# EAGLE board ledikuutio (EAGLE 6.1)
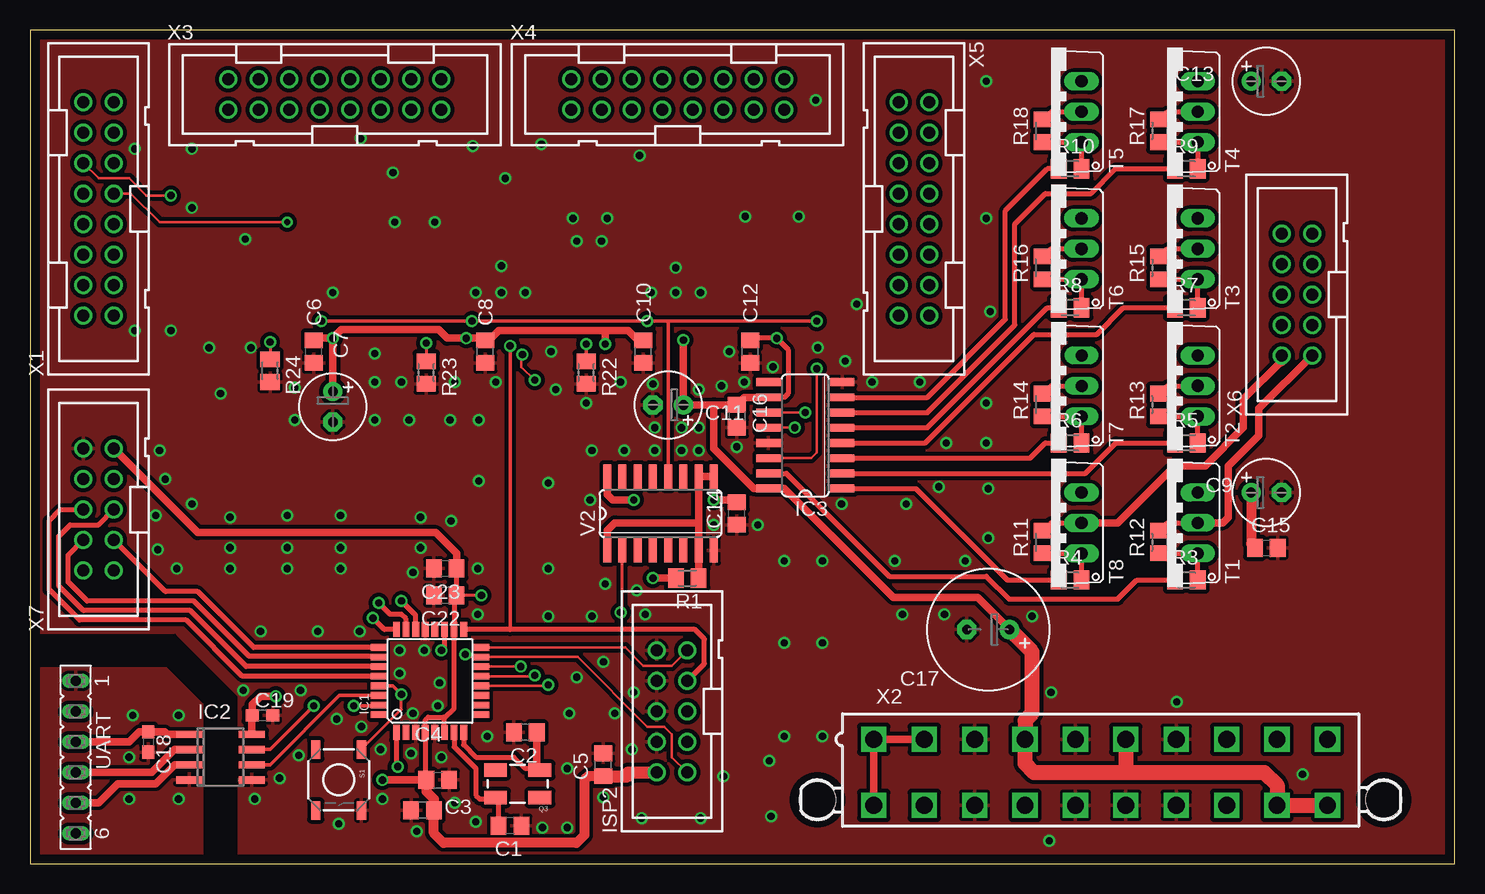
[diagram p0: board, top side]
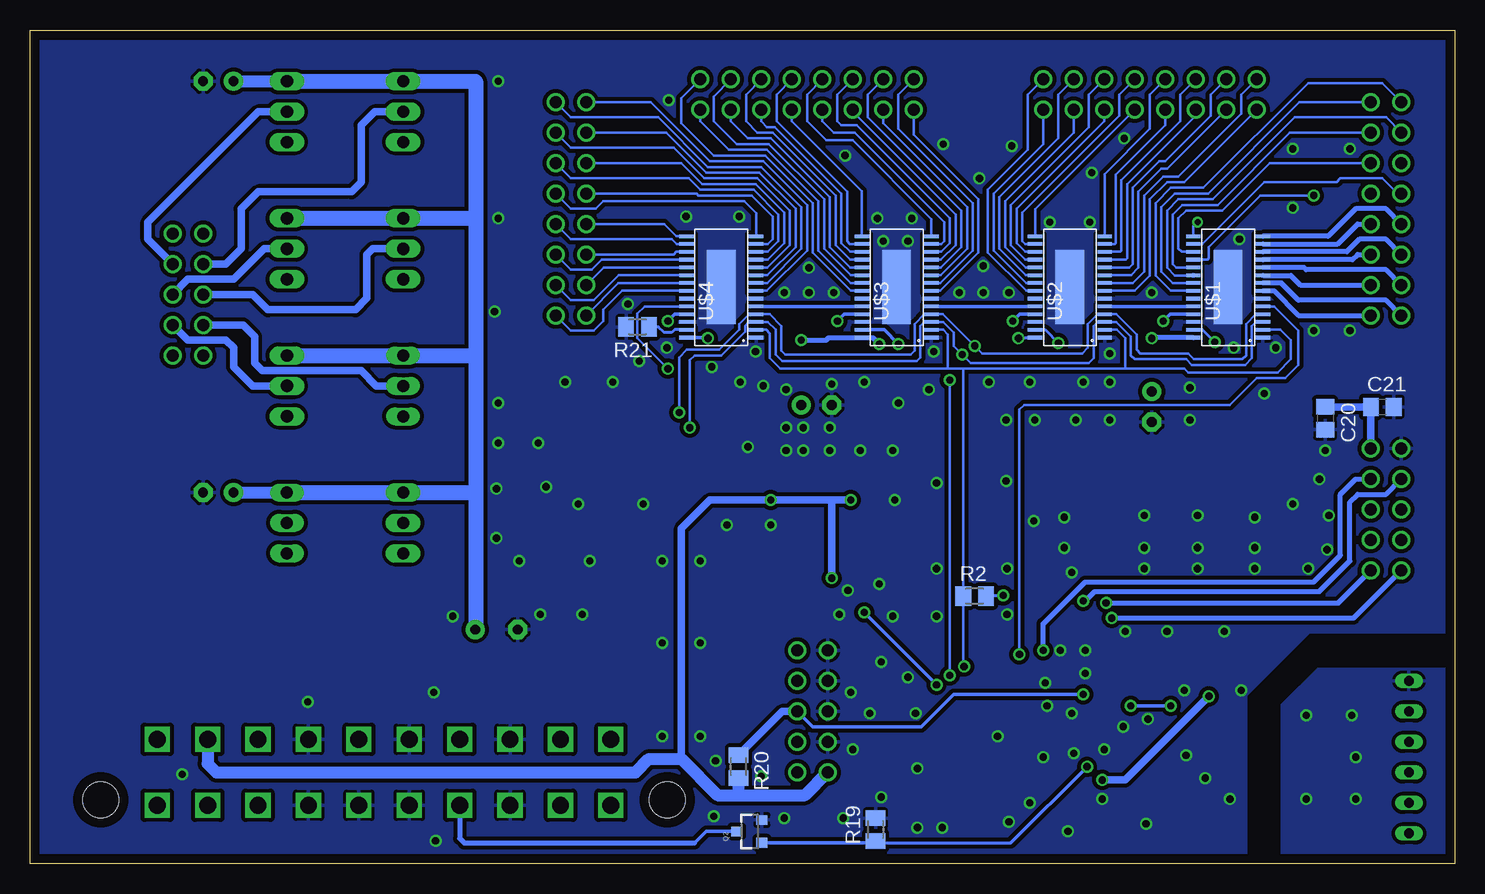
[diagram p1: board, bottom side, seen from below]

Size 118.72 x 69.52 mm. Coordinates in mm from the lower left corner, seen from the top.
Outline: 0,0 118.72,0 118.72,69.52 0,69.52 0,0
Copper layers (1*16): Top 0.035mm / dielectric 1.55mm / Bottom 0.035mm
Design rules: minimum track width 0.15mm, minimum drill 0.4mm, track to track 0.2mm, track to pad 0.2mm, pad to pad 0.2mm, via to via 0.2mm, smd to smd 0.2mm, copper to edge 0.8mm, drill to drill 8mil, minimum pad ring 0.2mm, minimum via ring 0.2mm, stop-mask expansion 4mil, vias tented up to drill 0mil, thermal gap 10mil
Net classes: 1 digital signal: width 0.15 mm, drill 0.6 mm, clearance 0.15 mm

## Footprints (pad centres in the part's own frame; a part is rotated, then mirrored left to right if it is on the bottom)
C0805 = smd 1.3 x 1.5: 1 -0.95,0; 2 0.95,0
E2,5-6 = drill 0.813 pad 1.6: + -1.27,0 | drill 0.813 pad 1.6 octagon: - 1.27,0
E3,5-10 = drill 0.813 pad 1.6: + -1.778,0 | drill 0.813 pad 1.6 octagon: - 1.778,0
C0603 = smd 1.1 x 1: 1 -0.85,0; 2 0.85,0
TQFP32-08 = smd 1.27 x 0.559: 1 -4.293,2.8; 2 -4.293,2; 3 -4.293,1.2; 4 -4.293,0.4; 5 -4.293,-0.4; 6 -4.293,-1.2; 7 -4.293,-2; 8 -4.293,-2.8; 17 4.293,-2.8; 18 4.293,-2; 19 4.293,-1.2; 20 4.293,-0.4; 21 4.293,0.4; 22 4.293,1.2; 23 4.293,2; 24 4.293,2.8 | smd 0.559 x 1.27: 9 -2.8,-4.293; 10 -2,-4.293; 11 -1.2,-4.293; 12 -0.4,-4.293; 13 0.4,-4.293; 14 1.2,-4.293; 15 2,-4.293; 16 2.8,-4.293; 25 2.8,4.293; 26 2,4.293; 27 1.2,4.293; 28 0.4,4.293; 29 -0.4,4.293; 30 -1.2,4.293; 31 -2,4.293; 32 -2.8,4.293
SO-08 = smd 0.6 x 2.2: 1 -1.905,-2.6; 2 -0.635,-2.6; 3 0.635,-2.6; 4 1.905,-2.6; 5 1.905,2.6; 6 0.635,2.6; 7 -0.635,2.6; 8 -1.905,2.6
SO16 = smd 0.66 x 2.032: 1 -4.445,-3.073; 2 -3.175,-3.073; 3 -1.905,-3.073; 4 -0.635,-3.073; 5 0.635,-3.073; 6 1.905,-3.073; 7 3.175,-3.073; 8 4.445,-3.073; 9 4.445,3.073; 10 3.175,3.073; 11 1.905,3.073; 12 0.635,3.073; 13 -0.635,3.073; 14 -1.905,3.073; 15 -3.175,3.073; 16 -4.445,3.073
PAK100/2500-10 = drill 1 pad 1.422: 1 -5.08,-1.27; 2 -5.08,1.27; 3 -2.54,-1.27; 4 -2.54,1.27; 5 0,-1.27; 6 0,1.27; 7 2.54,-1.27; 8 2.54,1.27; 9 5.08,-1.27; 10 5.08,1.27
SOT23-3 = smd 0.8 x 0.9: 1 -0.95,-1; 2 0.95,-1; 3 0,1.1
CRYSTAL-SMD-5X3 = smd 1.9 x 1.1: 1 -1.85,-1.15; 2 1.85,-1.15; 3 1.85,1.15; 4 -1.85,1.15
M0805 = smd 1.3 x 1.6: 1 -0.95,0; 2 0.95,0
TACTILE_SWITCH_SMD = smd 1.524 x 0.762: 1 -2.54,1.905; 2 2.54,1.905; 3 -2.54,-1.905; 4 2.54,-1.905
TO220AV = drill 1 long: B -2.54,-2.54; C 0,-2.54; E 2.54,-2.54
TO220AV' = drill 1.016 long: B -2.54,-2.54; C 0,-2.54; E 2.54,-2.54
PWP28 = smd 0.3 x 1.2: 1 -4.229,-2.908; 2 -3.579,-2.908; 3 -2.929,-2.908; 4 -2.279,-2.908; 5 -1.629,-2.908; 6 -0.979,-2.908; 7 -0.329,-2.908; 8 0.321,-2.908; 9 0.971,-2.908; 10 1.621,-2.908; 11 2.271,-2.908; 12 2.921,-2.908; 13 3.571,-2.908; 14 4.221,-2.908; 15 4.221,2.892; 16 3.571,2.892; 17 2.921,2.892; 18 2.271,2.892; 19 1.621,2.892; 20 0.971,2.892; 21 0.321,2.892; 22 -0.329,2.892; 23 -0.979,2.892; 24 -1.629,2.892; 25 -2.279,2.892; 26 -2.929,2.892; 27 -3.579,2.892; 28 -4.229,2.892 | smd 6.17 x 2.4: THERMAL 0,0
FE06 = drill 0.813 long: 1 -6.35,0; 2 -3.81,0; 3 -1.27,0; 4 1.27,0; 5 3.81,0; 6 6.35,0
PAK100/2500-16 = drill 1 pad 1.422: 1 -8.89,-1.27; 2 -8.89,1.27; 3 -6.35,-1.27; 4 -6.35,1.27; 5 -3.81,-1.27; 6 -3.81,1.27; 7 -1.27,-1.27; 8 -1.27,1.27; 9 1.27,-1.27; 10 1.27,1.27; 11 3.81,-1.27; 12 3.81,1.27; 13 6.35,-1.27; 14 6.35,1.27; 15 8.89,-1.27; 16 8.89,1.27
5566-20 = drill 1.4 square: 1 18.9,-2.75; 2 14.7,-2.75; 3 10.5,-2.75; 4 6.3,-2.75; 5 2.1,-2.75; 6 -2.1,-2.75; 7 -6.3,-2.75; 8 -10.5,-2.75; 9 -14.7,-2.75; 10 -18.9,-2.75; 11 18.9,2.75; 12 14.7,2.75; 13 10.5,2.75; 14 6.3,2.75; 15 2.1,2.75; 16 -2.1,2.75; 17 -6.3,2.75; 18 -10.5,2.75; 19 -14.7,2.75; 20 -18.9,2.75 | hole 3: 23.6,2.29; -23.6,2.29

## Placement (x,y rotation side)
C1  18pF  [C0805]  40.01,3.17 180 top
C2  18pF  [C0805]  41.27,10.95 180 top
C3  100nF  [C0805]  32.7,4.45 180 top
C4  10nF  [C0805]  33.97,6.99 0 top
C5  100nF  [C0805]  47.78,8.26 90 top
C6  10nF  [C0805]  23.65,42.7 90 top
C7  10uF  [E2,5-6]  25.24,38.1 270 top
C8  10nF  [C0805]  37.94,42.7 90 top
C9  10uF  [E2,5-6]  103.03,30.96 0 top
C10  10nF  [C0805]  51.12,42.7 90 top
C11  10uF  [E2,5-6]  53.18,38.26 180 top
C12  10nF  [C0805]  60.01,42.7 90 top
C13  10uF  [E2,5-6]  103.03,65.25 0 top
C14  100nF  [C0805]  58.9,29.21 90 top
C15  100nF  [C0805]  103.03,26.35 0 top
C16  10nF  [C0805]  58.9,37.31 270 top
C17  1000uF  [E3,5-10]  79.85,19.53 180 top
C18  100nF  [C0603]  9.84,10.16 270 top
C19  100nF  [C0603]  19.37,12.38 0 top
C20  10nF  [C0805]  10.79,37.15 270 bottom
C21  100nF  [C0805]  6.03,38.1 0 bottom
C22  10nF  [C0805]  34.61,22.38 180 top
C23  100nF  [C0805]  34.61,24.61 180 top
IC1  ATMEGA328P  [TQFP32-08]  33.34,15.24 90 top
IC2  ISO7221A  [SO-08]  15.88,8.89 270 top
IC3  74HC595D  [SO16]  64.61,35.72 90 top
ISP2  2510-  [PAK100/2500-10]  53.5,12.7 90 top
Q2  MOSFET-NCHANNELSMD  [SOT23-3]  58.74,2.7 90 bottom
Q3  16mhz  [CRYSTAL-SMD-5X3]  40.64,6.67 180 top
R1  220  [M0805]  54.77,23.81 180 top
R2  10k  [M0805]  40.01,22.3 0 bottom
R3  1k  [M0805]  96.36,23.65 0 top
R4  1k  [M0805]  86.68,23.65 0 top
R5  1k  [M0805]  96.36,35.08 0 top
R6  1k  [M0805]  86.68,35.08 0 top
R7  1k  [M0805]  96.36,46.35 0 top
R8  1k  [M0805]  86.68,46.35 0 top
R9  1k  [M0805]  96.36,57.94 0 top
R10  1k  [M0805]  86.68,57.94 0 top
R11  1k  [M0805]  84.45,26.83 90 top
R12  1k  [M0805]  94.14,26.83 90 top
R13  1k  [M0805]  94.14,38.26 90 top
R14  1k  [M0805]  84.45,38.26 90 top
R15  1k  [M0805]  94.14,49.69 90 top
R16  1k  [M0805]  84.45,49.69 90 top
R17  1k  [M0805]  94.14,61.12 90 top
R18  1k  [M0805]  84.45,61.12 90 top
R19  10k  [M0805]  48.26,2.86 90 bottom
R20  10k  [M0805]  59.69,8.1 270 bottom
R21  1920ohm  [M0805]  68.1,44.77 180 bottom
R22  1920ohm  [M0805]  46.35,40.96 270 top
R23  1920ohm  [M0805]  33.02,40.96 270 top
R24  1920ohm  [M0805]  20,41.12 270 top
S1  RESET  [TACTILE_SWITCH_SMD]  25.72,6.99 270 top
T1  TIP42  [TO220AV]  94.77,28.42 90 top
T2  TIP42  [TO220AV']  94.77,39.85 90 top
T3  TIP42  [TO220AV']  94.77,51.28 90 top
T4  TIP42  [TO220AV']  94.77,62.71 90 top
T5  TIP42  [TO220AV']  85.09,62.71 90 top
T6  TIP42  [TO220AV']  85.09,51.28 90 top
T7  TIP42  [TO220AV]  85.09,39.85 90 top
T8  TIP42  [TO220AV']  85.09,28.42 90 top
U$1  TLC5940TLC5940PWP  [PWP28]  18.89,48.1 90 bottom
U$2  TLC5940TLC5940PWP  [PWP28]  32.07,48.1 90 bottom
U$3  TLC5940TLC5940PWP  [PWP28]  46.51,48.1 90 bottom
U$4  TLC5940TLC5940PWP  [PWP28]  61.12,48.1 90 bottom
UART  [FE06]  3.81,8.89 270 top
V2  74163  [SO16]  52.55,29.21 0 top
X1  2516-  [PAK100/2500-16]  5.71,54.61 90 top
X2  5566-20  [5566-20]  89.22,7.62 180 top
X3  2516-  [PAK100/2500-16]  25.4,64.14 0 top
X4  2516-  [PAK100/2500-16]  53.98,64.14 0 top
X5  2516-  [PAK100/2500-16]  73.66,54.61 270 top
X6  2510-  [PAK100/2500-10]  105.57,47.47 90 top
X7  ANALOG IO  [PAK100/2500-10]  5.71,29.53 90 top

## Library data of the parts
C1-C23 R1-R24 = rcl
IC1 = atmel
IC2 = texas
IC3 = 74xx-eu
ISP2 X1 X3-X7 = con-3m
Q2 Q3 S1 = SparkFun
T1 T7 U$1-U$4 = elovalo
T2-T6 T8 = transistor-power
UART = con-lsta
V2 = 74ttl-din
X2 = con-molex

## Nets
595_SOUT: IC3.9
+3V3: X2.1 X2.2 X2.11
+5V [+5V]: C6.2 C7.+ C8.2 C9.+ C10.2 C11.+ C12.2 C13.+ C15.1 C16.1 C17.+ IC3.10 IC3.16 T1.E T2.E T3.E T4.E T5.E T6.E T7.E T8.E U$1.28 U$2.28 U$3.28 U$4.28 X2.4 X2.6 X2.19 X2.20
+12V: X2.10
-5V: X2.18
-12V: X2.12
ADC0: IC1.23 X7.1
ADC1: IC1.24 X7.2
ADC2: IC1.25 X7.3
ADC3: IC1.26 X7.4
ADC4: IC1.27 X7.5
ADC5: IC1.28 X7.6
ADC6: IC1.19 X7.7
ADC7: IC1.22 X7.8
BLANK [digital signal]: IC1.14 R2.1 U$1.2 U$2.2 U$3.2 U$4.2
GND: C1.1 C2.2 C3.2 C4.2 C5.2 C6.1 C7.- C8.1 C9.- C10.1 C11.- C12.1 C13.- C14.1 C15.2 C16.2 C17.- C19.2 C20.2 C21.2 C22.2 C23.2 IC1.3 IC1.5 IC1.21 IC2.5 IC3.8 IC3.13 ISP2.4 ISP2.6 ISP2.8 ISP2.10 Q2.2 R19.2 R21.2 R22.2 R23.2 R24.2 S1.2 U$1.1 U$1.6 U$1.26 U$1.THERMAL U$2.1 U$2.6 U$2.26 U$2.THERMAL U$3.1 U$3.6 U$3.26 U$3.THERMAL U$4.1 U$4.6 U$4.26 U$4.THERMAL V2.8 X2.3 X2.5 X2.7 X2.13 X2.15 X2.16 X2.17 X7.10
GND1: C18.2 IC2.4 UART.1
GSCLK [digital signal]: IC1.12 V2.2
GSCLK/4: U$1.25 U$2.25 U$3.25 U$4.25 V2.12
MISO: IC1.16 ISP2.9
MOSI [digital signal]: IC1.15 ISP2.1 U$1.5
N$1: U$1.24 U$2.5
N$2: C1.2 IC1.7 Q3.3
N$3: C2.1 IC1.8 Q3.1
N$4: U$2.24 U$3.5
N$5: R21.1 U$4.27
N$6: R23.1 U$2.27
N$7: R11.2 T8.C X6.2
N$8: R14.2 T7.C X6.4
N$9: R16.2 T6.C X6.6
N$10: R18.2 T5.C X6.8
N$11: R12.2 T1.C X6.1
N$12: R13.2 T2.C X6.3
N$13: R15.2 T3.C X6.5
N$14: R17.2 T4.C X6.7
N$15: IC3.15 R3.1
N$16: IC3.1 R4.1
N$17: IC3.2 R5.1
N$18: IC3.3 R6.1
N$19: IC3.4 R7.1
N$20: IC3.5 R8.1
N$21: IC3.6 R9.1
N$22: IC3.7 R10.1
N$23: R5.2 R13.1 T2.B
N$24: R3.2 R12.1 T1.B
N$25: R4.2 R11.1 T8.B
N$26: R6.2 R14.1 T7.B
N$27: R7.2 R15.1 T3.B
N$28: R8.2 R16.1 T6.B
N$29: R9.2 R17.1 T4.B
N$30: R10.2 R18.1 T5.B
N$31: Q2.3 X2.14
N$32: U$1.7 X1.1
N$33: U$1.8 X1.2
N$34: U$1.9 X1.3
N$35: U$1.10 X1.4
N$36: U$1.11 X1.5
N$37: U$1.12 X1.6
N$38: U$1.13 X1.7
N$39: U$1.14 X1.8
N$40: U$1.15 X1.9
N$41: U$1.16 X1.10
N$42: U$1.17 X1.11
N$43: U$1.18 X1.12
N$44: U$1.19 X1.13
N$45: U$1.20 X1.14
N$46: U$1.21 X1.15
N$47: U$1.22 X1.16
N$48: R24.1 U$1.27
N$49: U$2.7 X3.1
N$50: U$2.8 X3.2
N$51: U$2.9 X3.3
N$52: U$2.10 X3.4
N$53: U$2.11 X3.5
N$54: U$2.12 X3.6
N$55: U$2.13 X3.7
N$56: U$2.14 X3.8
N$57: U$2.15 X3.9
N$58: U$2.16 X3.10
N$59: U$2.17 X3.11
N$60: U$2.18 X3.12
N$61: U$2.19 X3.13
N$62: U$2.20 X3.14
N$63: U$2.21 X3.15
N$64: U$2.22 X3.16
N$65: U$3.7 X4.1
N$66: U$3.8 X4.2
N$67: U$3.9 X4.3
N$68: U$3.10 X4.4
N$69: U$3.11 X4.5
N$70: U$3.12 X4.6
N$71: U$3.13 X4.7
N$72: U$3.14 X4.8
N$73: U$3.15 X4.9
N$74: U$3.16 X4.10
N$75: U$3.17 X4.11
N$76: U$3.18 X4.12
N$77: U$3.19 X4.13
N$78: U$3.20 X4.14
N$79: U$3.21 X4.15
N$80: U$3.22 X4.16
N$81: U$4.7 X5.1
N$82: U$4.8 X5.2
N$83: U$4.9 X5.3
N$84: U$4.10 X5.4
N$85: U$4.11 X5.5
N$86: U$4.12 X5.6
N$87: U$4.13 X5.7
N$88: U$4.14 X5.8
N$89: U$4.15 X5.9
N$90: U$4.16 X5.10
N$91: U$4.17 X5.11
N$92: U$4.18 X5.12
N$93: U$4.19 X5.13
N$94: U$4.20 X5.14
N$95: U$4.21 X5.15
N$96: U$4.22 X5.16
N$97: U$3.24 U$4.5
N$98: R1.1 V2.1 V2.7 V2.9 V2.10
N$99: R22.1 U$3.27
PS_ON [digital signal]: IC1.1 Q2.1 R19.1
PWR_OK: X2.8
RESET: IC1.29 ISP2.5 R20.1 S1.1
RXD [digital signal]: IC1.30 IC2.6
RXD_FT232R: IC2.3 UART.5
SCLK [digital signal]: IC1.17 IC3.11 ISP2.7 U$1.4 U$2.4 U$3.4 U$4.4
TLC_SOUT: IC3.14 U$4.24
TXD [digital signal]: IC1.31 IC2.7
TXD_FT232R: IC2.2 UART.4
VCC: C3.1 C4.1 C5.1 C14.2 C19.1 C20.1 C21.1 C22.1 C23.1 IC1.4 IC1.6 IC1.18 IC2.8 ISP2.2 R1.2 R2.2 R20.2 V2.16 X2.9 X7.9
VDD: C18.1 IC2.1 UART.3
XLAT [digital signal]: IC1.13 IC3.12 U$1.3 U$2.3 U$3.3 U$4.3

## Tracks (layer width: path | path; a pad name or v marks a point on that pad's centre or on a via)
+3V3
  Top 0.61: X2.2 X2.1 X2.11
+5V  (via drill 0.6, 0.6 pad 0.8)
  Top 0.254: 47.94,44.29 48.1,44.45
  Top 0.406: 23.82,43.81 C6.2 23.49,43.81 | C10.2 50.96,43.81 | C12.2 60.01,43.81 v62.23,43.81 63.18,42.86 63.18,39.21 62.87,38.89 IC3.10 | C16.1
  Top 0.61: v25.24,43.81 25.96,44.53 34.05,44.53 34.77,43.81 v36.35,43.81 37.78,43.81 C8.2 38.26,43.65 39.05,44.45 48.1,44.45 49.85,44.45 50.64,43.65 C10.2 | v25.24,43.81 23.82,43.81 | 23.49,43.81 v25.24,43.81 | v25.24,43.81 C7.+ | IC3.10 59.53,38.89 C16.1 | 56.99,38.26 C11.+ v54.45,43.66 | 56.99,38.26 C16.1 | 56.99,38.26 56.99,34.61 60.33,31.27 IC3.16 62.87,31.27 71.94,22.19 78.96,22.19 C17.+ | v47.94,43.34 47.94,44.29
  Top 0.813: C9.+ 101.76,26.67 C15.1
  Top 1.27: X2.20 X2.19 103.92,6.57 102.87,7.62 91.32,7.62 | 91.32,7.62 83.66,7.62 82.92,8.36 X2.4 82.92,11.96 83.5,12.54 83.5,17.65 C17.+ | X2.6 91.32,7.62
  Bottom 0.254: 25.18,43.87 v25.24,43.81 | U$2.28 35.02,43.81 v36.35,43.81
  Bottom 0.305: U$4.28 62.29,43.87 v62.23,43.81
  Bottom 0.406: v54.45,43.66 52.39,43.66 52.17,43.87 U$3.28 48.48,43.87 v47.94,43.34 | U$1.28 25.18,43.87
  Bottom 1.016: C13.+ T4.E | C9.+ T1.E | 81.6,19.56 C17.+
  Bottom 1.27: 81.6,53.82 81.6,65.25 T5.E T4.E | 81.6,53.82 81.6,42.39 | 81.6,42.39 81.6,30.96 | 81.6,30.96 T8.E T1.E | 81.6,42.39 T7.E T2.E | 81.6,53.82 T6.E T3.E | 81.6,30.96 81.6,19.56
ADC0  (via drill 0.6 pad 0.8)
  Top 0.406: IC1.23 31.34,20.41 30.96,20.8 30,20.8 v29.05,21.75
  Bottom 0.406: v29.05,21.75 9.68,21.75 X7.1
ADC1  (via drill 0.6 pad 0.8)
  Top 0.406: IC1.24 29.53,19.53 v28.57,20.48
  Bottom 0.406: v28.57,20.48 8.41,20.48 X7.2
ADC2
  Top 0.406: IC1.25 18.63,18.04 13.97,22.7 11.27,22.7 X7.3
ADC3
  Top 0.406: IC1.26 28.98,17.3 18.26,17.3 13.65,21.91 4.76,21.91 3.17,23.5 3.17,25.72 X7.4
ADC4
  Top 0.406: IC1.27 18.01,16.44 13.34,21.11 4.45,21.11 2.38,23.18 2.38,27.3 3.33,28.26 5.71,28.26 X7.5
ADC5
  Top 0.406: IC1.28 17.7,15.64 13.02,20.32 4.13,20.32 1.59,22.86 1.59,28.57 2.54,29.53 X7.6
ADC6  (via drill 0.6 pad 0.8)
  Top 0.406: IC1.19 34.54,18.03 v34.29,17.78
  Bottom 0.406: v34.29,17.78 34.29,20 30.8,23.5 11.75,23.5 9.53,25.72 9.53,30.8 8.26,32.07 X7.7
ADC7  (via drill 0.6 pad 0.8)
  Top 0.406: IC1.22 32.14,20.73 v30.96,21.91
  Bottom 0.406: v30.96,21.91 30.8,21.91 30,22.7 11.27,22.7 8.73,25.24 8.73,30.16 8.1,30.8 5.71,30.8 X7.8
B_CUT_ISOLATION
  cutout Bottom: 11.43,16.51 0,16.51 0,19.05 12.06,19.05 17.14,13.97 17.14,0 14.61,0 14.61,13.34
BLANK  (via drill 0.6 pad 0.8)
  Top 0.2: IC1.14 v40.89,16.44
  Bottom 0.2: 27.46,41.27 27.46,43.81 28.17,44.52 U$2.2 | U$3.2 42.62,44.52 42.23,44.13 42.23,41.27 | 42.23,41.27 40.95,41.27 | 40.95,41.27 27.46,41.27 | U$4.2 57.38,44.52 57.07,44.21 57.07,42.15 56.2,41.27 42.23,41.27 | U$1.2 14.52,44.52 13.65,43.66 13.65,42.07 14.76,40.96 22.23,40.96 22.54,41.27 27.46,41.27 | 40.95,41.27 R2.1 40.96,16.51 v40.89,16.44
GND  (via drill 0.6 pad 0.8, 0.6 pad 0.9)
  other vias: 23.97,19.37 18.73,5.4 42.7,3.02 38.1,10.64 44.93,12.54 61.59,8.57 62.87,10.64 44.77,7.94 44.77,3.02 45.56,15.56 29.21,9.53 27.46,19.37 29.37,5.4 19.21,19.37 30.8,17.78 31.91,12.54 18.41,43.02 35.4,40.16 58.26,42.7 30.96,40.16 38.81,40.16 57.63,39.85 67.94,41.91 53.82,49.69 41.27,47.62 25.24,47.62 68.9,46.67 28.73,40.16 43.81,39.53 46.35,38.42 55.72,39.53 22.07,36.99 15.88,39.21 14.92,43.02 28.73,42.55 43.42,42.7 13.49,54.69 17.94,52.07 37.15,47.62 39.29,49.85 39.29,47.62 30.4,53.5 33.73,53.5 30.24,57.63 39.61,57.15 36.91,59.85 42.62,60.01 45.24,53.82 48.1,53.82 59.61,53.98 64.06,53.98 51.75,47.62 55.88,47.62 53.82,47.62 50.8,59.05 27.54,60.48 13.49,59.61 8.73,59.61 8.73,44.45 11.75,44.45 65.48,63.66 34.29,8.89 49.21,40.16 65.64,43.02 61.91,41.43 47.62,51.91 45.56,51.91 59.53,40.16 58.9,34.77 60.64,28.26 31.91,24.29 10.79,34.45 11.27,32.07 25.88,24.61 10.64,26.19 12.22,24.61 17.78,14.45 16.67,24.61 21.43,24.61 22.54,14.45 10.48,29.05 16.67,26.35 21.43,26.35 25.88,26.35 25.88,29.05 21.43,29.05 16.67,28.89 13.49,30 32.54,26.35 32.54,28.89 37.31,20.8 56.99,28.26 49.53,34.45 52.07,34.45 46.83,34.45 46.67,30.32 54.29,34.45 51.91,40.01 54.29,36.35 52.07,36.35 51.28,20.8 50.32,14.29 50.56,22.78 27.62,11.43 22.38,9.05 20.8,7.14 25.56,12.06 35.08,28.57 35,36.99 28.73,36.99 31.59,36.99 37.39,36.99 22.07,39.69 32.86,17.78 34.13,15.08 37.15,3.49 32.23,2.7 47.78,5.56 57.78,7.3 50.96,3.81 55.88,3.81 55.72,34.45 55.72,36.35 30.8,15.88 33.97,13.18 25.72,3.33 37.39,31.91 37.31,24.61 43.18,20.64 48.74,12.54 50.16,9.53 31.75,9.21 35.4,5.08 61.75,3.97 84.93,1.91 106.05,7.46 95.57,13.49 75.72,31.43 66.04,10.64 62.87,18.41 66.04,18.41 62.87,25.24 66.04,25.24 67.63,30 72.07,25.24 76.2,20.8 72.71,20.8 85.09,14.29 77.95,25.24 73.03,30 83.5,20.64 79.85,27.15 79.85,31.27 76.36,35.08 79.69,35.08 79.69,38.42 80.01,46.04 79.69,53.82 79.69,65.25 43.18,31.75 43.18,24.61 46.83,20.64 47.94,23.34 70.17,40.16 74.14,40.16 47.78,16.83
  pour Bottom (isolate 0.33): 0,69.52 118.72,69.52 118.72,0 17.14,0 17.14,13.97 12.06,19.05 0,19.05
  pour Top (isolate 0.33, rank 2): 0,69.52 118.72,69.52 118.72,0 17.14,0 17.14,13.97 12.06,19.05 0,19.05
GND1  (via drill 0.6 pad 0.8)
  other vias: 8.57,12.38 12.38,12.38 8.26,5.4 12.38,5.4 8.26,8.89
  pour Top (isolate 0.305): 0,16.51 11.43,16.51 14.61,13.34 14.61,0 0,0
  pour Bottom (isolate 0.305): 0,16.51 11.43,16.51 14.61,13.34 14.61,0 0,0
GSCLK  (via drill 0.6)
  Top 0.2: IC1.12 43.1,14.84 v43.18,14.92
  Top 0.254: 49.37,21.11 V2.2
  Top 0.305: v49.21,20.95 49.37,21.11
  Bottom 0.305: v43.18,14.92 v49.21,20.95
GSCLK/4  (via drill 0.6 pad 0.8)
  Top 0.305: v24.29,45.24 v36.83,45.24 v51.44,45.24 53.18,45.24 | 53.18,45.24 v65.56,45.24 | V2.12 53.18,45.24
  Bottom 0.305: U$1.25 23.71,45.82 v24.29,45.24 | v36.83,45.24 36.25,45.82 U$2.25 | v51.44,45.24 50.86,45.82 U$3.25 | v65.56,45.24 64.98,45.82 U$4.25
MISO
  Top 0.2: ISP2.9 53.5,16.51 51.12,16.51 49.59,18.04 IC1.16
MOSI  (via drill 0.6)
  Top 0.2: ISP2.1 53.5,8.89 53.5,10.79 52.86,11.43 51.44,11.43 45.62,17.24 IC1.15 36.5,17.24 v36.27,17.46
  Bottom 0.2: v36.27,17.46 36.27,37.86 35.88,38.26 18.73,38.26 16.51,40.48 14.13,40.48 13.02,41.59 13.02,44.45 15.04,46.47 U$1.5
N$1
  Bottom 0.305: U$1.24 U$2.5
N$2
  Top 0.406: IC1.7 35.34,9.75 37.15,7.94 37.15,5.71 37.47,5.4 38.67,5.4 Q3.3 39.05,5.25 C1.2
N$3
  Top 0.406: IC1.8 36.14,9.9 37.15,8.89 40.32,8.89 41.27,7.94 42.37,7.94 Q3.1 42.23,8.08
  Top 0.61: 42.23,8.08 C2.1
N$4
  Bottom 0.305: U$2.24 U$3.5
N$5
  Bottom 0.254: U$4.27 65.02,44.52 65.25,44.29 65.88,44.29 66.36,44.77 R21.1
N$6  (via drill 0.6)
  Top 0.254: v33.02,43.42 R23.1
  Bottom 0.254: U$2.27 34.12,44.52 v33.02,43.42
N$7
  Top 0.406: R11.2 85.09,28.42 T8.C
  Top 0.61: T8.C 90.65,28.42 95.41,33.18 97.95,33.18 101.12,36.35 101.12,38.73 104.3,41.91
  Top 0.813: 104.3,41.91 X6.2
N$8
  Top 0.406: R14.2 85.09,39.85 T7.C
  Bottom 0.61: T7.C 89.85,39.85 91.12,41.12 99.38,41.12 100.01,41.75 100.01,43.97 100.97,44.93 X6.4
N$9
  Top 0.406: R16.2 85.09,51.28 T6.C
  Bottom 0.61: T6.C 90.17,51.28 90.65,50.8 90.65,47.15 91.6,46.2 98.9,46.2 100.17,47.47 X6.6
N$10
  Top 0.406: R18.2 85.09,62.71 T5.C
  Bottom 0.61: T5.C 90.01,62.71 91.12,61.59 91.12,56.83 91.92,56.04 99.69,56.04 101.12,54.61 101.12,51.28 102.39,50.01 X6.8
N$11
  Top 0.406: R12.2 94.78,28.42 T1.C
  Top 0.61: T1.C 99.38,28.42 99.85,28.89 99.85,33.18 102.39,35.72 102.39,37.94 X6.1
N$12
  Top 0.406: R13.2 94.78,39.85 T2.C
  Bottom 0.61: T2.C 100.17,39.85 101.76,41.43 101.76,43.02 102.39,43.66 105.57,43.66 X6.3
N$13
  Top 0.406: R15.2 94.78,51.28 T3.C
  Bottom 0.61: T3.C 99.22,51.28 101.76,48.74 105.57,48.74 X6.5
N$14
  Top 0.406: R17.2 94.78,62.71 T4.C
  Bottom 0.61: T4.C 99.69,62.71 108.9,53.5 108.9,52.07 X6.7
N$15
  Top 0.406: IC3.15 63.02,32.54 71.6,23.97 79.69,23.97 81.6,22.07 90.65,22.07 92.23,23.65 R3.1
N$16
  Top 0.406: IC3.1 73.82,31.27 81.44,23.65 R4.1
N$17
  Top 0.406: IC3.2 87.95,32.54 90.49,35.08 R5.1
N$18
  Top 0.406: IC3.3 83.34,33.81 84.61,35.08 R6.1
N$19
  Top 0.406: IC3.4 74.61,35.08 83.66,44.13 88.9,44.13 91.12,46.35 R7.1
N$20
  Top 0.406: IC3.5 74.77,36.35 84.77,46.35 R8.1
N$21
  Top 0.406: IC3.6 74.77,37.62 82.07,44.93 82.07,53.34 84.61,55.88 88.42,55.88 90.49,57.94 R9.1
N$22
  Top 0.406: IC3.7 74.77,38.89 81.28,45.4 81.28,54.45 84.77,57.94 R10.1
N$23
  Top 0.406: R13.1 T2.B R5.2
N$24
  Top 0.406: R12.1 T1.B R3.2
N$25
  Top 0.406: R11.1 T8.B R4.2
N$26
  Top 0.406: R14.1 T7.B R6.2
N$27
  Top 0.406: R15.1 T3.B R7.2
N$28
  Top 0.406: R16.1 T6.B R8.2
N$29
  Top 0.406: R17.1 T4.B R9.2
N$30
  Top 0.406: R18.1 T5.B R10.2
N$31
  Bottom 0.305: Q2.3 62.39,2.7 63.34,1.75
  Bottom 0.406: X2.14 82.92,2.11 82.55,1.75 63.34,1.75
N$32
  Bottom 0.406: U$1.7 15.07,47.77 13.02,45.72 X1.1
N$33
  Bottom 0.406: X1.2 5.71,46.99 13.02,46.99 14.45,48.42 U$1.8
N$34
  Bottom 0.406: U$1.9 15.96,49.05 13.65,49.05 12.86,48.26 X1.3
N$35
  Bottom 0.406: X1.4 5.71,49.53 12.38,49.53 12.57,49.72 U$1.10
N$36
  Bottom 0.406: U$1.11 8.52,50.37 8.1,50.8 X1.5
N$37
  Bottom 0.406: X1.6 5.71,52.07 7.94,52.07 8.98,51.02 U$1.12
N$38
  Bottom 0.406: U$1.13 9.76,51.67 8.1,53.34 X1.7
N$39
  Bottom 0.406: X1.8 5.71,54.61 8.26,54.61 10.54,52.32 U$1.14
N$40  (via drill 0.5 pad 0.8)
  Top 0.2: v21.43,53.5 10.79,53.5 8.41,55.88 X1.9
  Bottom 0.2: U$1.15 21.78,53.15 v21.43,53.5
N$41
  Bottom 0.2: X1.10 4.76,55.88 6.03,57.15 9.53,57.15 9.84,56.83 15.88,56.83 21.04,51.67 U$1.16
N$42
  Bottom 0.2: U$1.17 22.77,51.02 23.02,51.28 23.02,53.82 22.38,54.45 19.37,54.45 15.4,58.42 X1.11
N$43  (via drill 0.6 pad 0.8)
  Top 0.2: v11.75,55.72 9.68,55.72 8.26,57.15 5.71,57.15 X1.12
  Bottom 0.2: v11.75,55.72 16.19,55.72 20.48,51.44 20.48,50.48 20.59,50.37 U$1.18
N$44
  Bottom 0.2: U$1.19 23.21,49.72 23.5,50.01 23.5,54.13 22.7,54.93 19.76,54.93 13.73,60.96 X1.13
N$45
  Bottom 0.2: 21.8,49.05 23.34,49.05 23.97,49.69 23.97,54.45 23.02,55.4 20.16,55.4 13.34,62.23 5.71,62.23 X1.14
  Bottom 0.406: U$1.20 21.8,49.05
N$46
  Bottom 0.2: U$1.21 23.5,48.42 24.45,49.37 24.45,54.77 23.34,55.88 20.56,55.88 12.94,63.5 X1.15
N$47
  Bottom 0.2: U$1.22 23.64,47.77 24.92,49.05 24.92,55.09 23.65,56.36 20.95,56.36 12.22,65.09 6.03,65.09 X1.16
N$48  (via drill 0.6)
  Top 0.254: v20,43.5 R24.1
  Bottom 0.254: U$1.27 21.03,44.52 v20,43.5
N$49
  Bottom 0.2: U$2.7 26.68,47.77 25.4,49.05 25.4,55.4 23.97,56.83 22.54,56.83 X3.1
N$50
  Bottom 0.2: X3.2 17.78,64.14 17.78,62.55 23.02,57.31 24.29,57.31 25.88,55.72 25.88,49.37 26.82,48.42 U$2.8
N$51
  Bottom 0.2: U$2.9 26.97,49.07 26.35,49.69 26.35,56.04 24.45,57.94 23.97,57.94 X3.3
N$52
  Bottom 0.2: X3.4 20.32,64.14 20.32,62.39 24.13,58.58 24.61,58.58 26.83,56.36 26.83,50.01 27.11,49.72 U$2.10 29.13,49.69
N$53
  Bottom 0.2: U$2.11 27.41,50.37 27.3,50.48 27.3,56.67 21.59,62.39 X3.5
N$54
  Bottom 0.2: U$2.12 27.88,51.02 27.78,51.12 27.78,56.99 22.86,61.91 22.86,64.14 X3.6
N$55
  Bottom 0.2: U$2.13 28.34,51.67 28.26,51.75 28.26,57.47 24.13,61.59 X3.7
N$56
  Bottom 0.2: U$2.14 29.16,57.52 25.4,61.28 25.4,64.14 X3.8
N$57
  Bottom 0.2: U$2.15 34.96,54.58 X3.9
N$58
  Bottom 0.2: U$2.16 35.8,51.67 36.04,51.91 36.04,54.29 27.94,62.39 27.94,64.14 X3.10
N$59
  Bottom 0.2: U$2.17 35.78,51.02 36.51,51.75 36.51,54.61 29.21,61.91 X3.11
N$60
  Bottom 0.2: U$2.18 35.77,50.37 36.99,51.59 36.99,54.93 30.48,61.44 30.48,64.14 X3.12
N$61
  Bottom 0.2: U$2.19 35.75,49.72 37.47,51.44 37.47,55.24 31.75,60.96 X3.13
N$62
  Bottom 0.2: U$2.20 35.74,49.07 37.94,51.28 37.94,55.56 33.02,60.48 33.02,64.14 X3.14
N$63
  Bottom 0.2: U$2.21 35.72,48.42 38.42,51.12 38.42,55.88 34.29,60.01 X3.15
N$64
  Bottom 0.2: U$2.22 35.71,47.77 38.89,50.96 38.89,56.2 35.56,59.53 35.56,64.14 X3.16
N$65
  Bottom 0.2: U$3.7 42.87,47.77 39.69,50.96 39.69,55.4 45.09,60.8 X4.1
N$66
  Bottom 0.2: U$3.8 42.86,48.42 40.16,51.12 40.16,55.09 46.35,61.28 46.35,64.14 X4.2
N$67
  Bottom 0.2: U$3.9 42.84,49.07 40.64,51.28 40.64,54.77 47.62,61.75 X4.3
N$68
  Bottom 0.2: U$3.10 42.83,49.72 41.12,51.44 41.12,54.45 48.9,62.23 48.9,64.14 X4.4
N$69
  Bottom 0.2: U$3.11 42.81,50.37 41.59,51.59 41.59,54.13 50.16,62.71 X4.5
N$70
  Bottom 0.2: U$3.12 42.8,51.02 42.07,51.75 42.07,53.82 49.85,61.59 51.12,61.59 51.44,61.91 51.44,64.14 X4.6
N$71
  Bottom 0.2: U$3.13 42.78,51.67 42.55,51.91 42.55,53.5 50.01,60.96 51.75,60.96 52.7,61.91 X4.7
N$72
  Bottom 0.2: U$3.14 43.61,53.77 50.16,60.33 52.39,60.33 53.98,61.91 53.98,64.14 X4.8
N$73
  Bottom 0.2: U$3.15 49.41,56.07 55.24,61.91 X4.9
N$74
  Bottom 0.2: U$3.16 50.4,51.67 50.64,51.91 50.64,56.04 56.52,61.91 56.52,64.14 X4.10
N$75
  Bottom 0.2: U$3.17 50.39,51.02 51.12,51.75 51.12,55.88 56.67,61.44 57.31,61.44 57.78,61.91 X4.11
N$76
  Bottom 0.2: U$3.18 50.37,50.37 51.59,51.59 51.59,55.72 56.83,60.96 58.1,60.96 59.05,61.91 59.05,64.14 X4.12
N$77
  Bottom 0.2: U$3.19 50.36,49.72 52.07,51.44 52.07,55.56 56.99,60.48 58.9,60.48 60.33,61.91 X4.13
N$78
  Bottom 0.2: U$3.20 50.34,49.07 52.55,51.28 52.55,55.4 57.15,60.01 59.85,60.01 61.75,61.91 61.75,63.98 X4.14
N$79
  Bottom 0.2: U$3.21 50.33,48.42 53.02,51.12 53.02,55.24 57.31,59.53 60.48,59.53 62.87,61.91 X4.15
N$80
  Bottom 0.2: U$3.22 50.31,47.77 53.5,50.96 53.5,55.09 57.47,59.05 61.75,59.05 64.45,61.75 64.45,63.82 X4.16
N$81
  Bottom 0.2: U$4.7 57.32,47.77 53.98,51.12 53.98,54.93 57.63,58.58 62.07,58.58 66.99,63.5 X5.1
N$82
  Bottom 0.2: U$4.8 57.3,48.42 54.45,51.28 54.45,54.77 57.78,58.1 62.23,58.1 66.36,62.23 73.66,62.23 X5.2
N$83
  Bottom 0.2: U$4.9 57.29,49.07 54.93,51.44 54.93,54.61 57.94,57.63 62.39,57.63 65.72,60.96 X5.3
N$84
  Bottom 0.2: U$4.10 57.27,49.72 55.4,51.59 55.4,54.45 58.1,57.15 62.55,57.15 65.09,59.69 73.66,59.69 X5.4
N$85
  Bottom 0.2: U$4.11 57.26,50.37 55.88,51.75 55.88,54.29 58.26,56.67 62.71,56.67 64.45,58.42 X5.5
N$86
  Bottom 0.2: U$4.12 57.24,51.02 56.36,51.91 56.36,54.13 58.42,56.2 62.87,56.2 63.82,57.15 73.66,57.15 X5.6
N$87
  Bottom 0.2: U$4.13 57.23,51.67 56.83,52.07 56.83,53.98 58.58,55.72 63.02,55.72 63.18,55.88 X5.7
N$88
  Bottom 0.2: U$4.14 58.21,54.24 59.21,55.24 70.96,55.24 71.6,54.61 73.66,54.61 X5.8
N$89
  Bottom 0.2: U$4.15 64.86,52.32 65.88,53.34 X5.9
N$90
  Bottom 0.2: U$4.16 64.85,51.67 65.25,52.07 73.66,52.07 X5.10
N$91
  Bottom 0.2: U$4.17 64.86,51.02 65.09,50.8 X5.11
N$92
  Bottom 0.2: U$4.18 71.07,50.37 71.91,49.53 73.66,49.53 X5.12
N$93
  Bottom 0.2: U$4.19 70.93,49.72 X5.13
N$94
  Bottom 0.2: U$4.20 69.67,49.07 71.75,46.99 73.66,46.99 X5.14
N$95
  Bottom 0.2: U$4.21 69.69,48.42 X5.15
N$96
  Bottom 0.2: U$4.22 69.39,47.77 70.96,46.2 70.96,45.24 71.75,44.45 73.66,44.45 X5.16
N$97
  Bottom 0.305: U$3.24 U$4.5
N$98
  Top 0.61: 55.72,28.42 V2.7 R1.1 | 55.72,28.42 V2.10 V2.9 | V2.1 48.1,27.78 48.74,28.42 55.72,28.42
N$99  (via drill 0.6)
  Top 0.305: v46.35,43.34 R22.1
  Bottom 0.305: U$3.27 47.54,44.52 v46.35,43.34
PS_ON  (via drill 0.6 pad 0.8)
  Top 0.406: IC1.1 30.54,8.2 v30.64,8.1
  Bottom 0.254: 48.1,1.75 36.99,1.75
  Bottom 0.305: 36.99,1.75 v30.64,8.1 | 48.1,1.75 arc90 R19.1 48.42,1.75 54.61,1.75 Q2.1
RESET  (via drill 0.6)
  Top 0.254: S1.1 30.96,12.86 v30.96,14.13
  Top 0.305: IC1.29 30.25,14.84 v30.96,14.13
  Bottom 0.305: ISP2.5 53.5,11.43 44.45,11.43 41.75,14.13 v30.96,14.13
  Bottom 0.61: ISP2.5 56.04,12.7 R20.1
RXD
  Top 0.254: 28.98,13.97 IC1.30
  Top 0.305: IC2.6 20,8.26 25.79,14.04 IC1.30
RXD_FT232R
  Top 0.406: 12.06,8.26 IC2.3
  Top 0.61: UART.5 5.71,5.08 7.3,6.67 10.48,6.67 12.06,8.26
SCLK  (via drill 0.6, 0.6 pad 0.8)
  Top 0.2: IC3.11 v64.61,37.62
  Top 0.305: 40.01,19.53 v40.01,43.18
  Top 0.406: ISP2.7 56.2,16.67 56.2,18.73 55.4,19.53 40.01,19.53 IC1.17
  Bottom 0.2: U$1.4 16.57,45.82 17.38,45.01 17.38,42.39 17.7,42.07 21.75,42.07 22.23,42.55 26.19,42.55 26.51,42.86 26.51,44.13 28.2,45.82 U$2.4 29.74,45.82 30.56,45.01 30.56,43.02 31.04,42.55 39.37,42.55 v40.01,43.18 42.65,45.82 U$3.4 44.19,45.82 45.01,45.01 45.01,42.78 45.32,42.47 55.8,42.47 56.12,42.78 56.12,44.85 57.09,45.82 U$4.4 58.79,45.82 59.61,45.01 59.61,44.53 61.28,42.86 63.98,42.86 64.61,42.23 v64.61,37.62
T_CUT_ISOLATION
  cutout Top: 11.43,16.51 0,16.51 0,19.05 12.06,19.05 17.14,13.97 17.14,0 14.61,0 14.61,13.34
TLC_SOUT  (via drill 0.6 pad 0.8)
  Top 0.2: v65.56,41.27 65.56,34.29 65.09,33.81 IC3.14
  Bottom 0.2: U$4.24 67.51,46.47 68.1,45.88 68.1,43.81 v65.56,41.27
TXD  (via drill 0.6 pad 0.8)
  Top 0.305: IC2.7 20,9.53 v23.65,13.18 | v26.99,13.18 28.98,13.18 IC1.31
  Bottom 0.305: v23.65,13.18 v26.99,13.18
TXD_FT232R
  Top 0.406: 12.06,9.53 IC2.2
  Top 0.61: UART.4 10.16,7.62 12.06,9.53
VCC  (via drill 0.6, 0.6 pad 0.8)
  Top 0.254: v37.62,22.38 C22.1
  Top 0.406: C19.1 18.48,12.34 | C4.1 32.94,7.07 IC1.4 32.94,11.98 33.18,12.22 34.47,12.22 34.54,12.15 | C23.1 C22.1 35.34,22.16 IC1.18 35.34,12.95 34.54,12.15 | IC1.6 34.54,12.15
  Top 0.61: 18.48,12.34 IC2.8 | v29.37,6.99 C4.1 | C23.1 35.56,25.88 33.81,27.62 13.97,27.62 X7.9 | V2.16 48.1,30.8 48.58,30.32 v50.32,30.32 | C14.2 59.06,30.32 v56.99,30.32 | v20.48,13.97 19.21,13.97 18.52,13.28 C19.1 | R1.2 v51.91,23.81
  Top 0.813: C4.1 33.02,6.03 33.65,5.4 C3.1 33.65,2.54 34.45,1.75 45.56,1.75 46.2,2.38 46.2,6.99 46.52,7.3 C5.1
  Top 1.016: C5.1 49.85,7.3 49.85,7.62 ISP2.2
  Bottom 0.2: R2.2 39.05,22.38
  Bottom 0.254: 39.05,22.38 v37.62,22.38
  Bottom 0.61: X7.9 C21.1 C20.1 | v50.32,30.32 51.91,30.32 | 51.91,30.32 v56.99,30.32 62.07,30.32 64.45,27.94 64.45,8.73 | v51.91,23.81 51.91,30.32 | v29.37,6.99 27.46,6.99 v20.48,13.97 | 59.69,5.87 59.85,5.71
  Bottom 1.016: X2.9 103.92,8.35 103.19,7.62 68.26,7.62 67.15,8.73 64.45,8.73 61.44,5.71 59.85,5.71 54.13,5.71 ISP2.2 | R20.2 59.69,5.87
VDD
  Top 0.406: IC2.1 12.06,10.79
  Top 0.61: UART.3 8.26,10.16 9.11,11.01 C18.1 11.21,11.01 11.43,10.79 IC2.1
XLAT  (via drill 0.6, 0.6 pad 0.8)
  Top 0.2: IC3.12 v63.74,36.35 | IC1.13 41.99,15.64 v42.07,15.72 | v42.07,40.32 40.96,41.43 40.96,42.39 v41.04,42.47
  Bottom 0.2: U$1.3 16.58,45.17 16.91,44.85 16.91,42.15 17.46,41.59 21.91,41.59 22.38,42.07 26.67,42.07 26.99,42.39 26.99,43.97 28.19,45.17 U$2.3 29.76,45.17 30.08,44.85 30.08,42.15 30.48,41.75 40.32,41.75 v41.04,42.47 41.75,43.18 41.75,44.29 42.63,45.17 U$3.3 44.2,45.17 44.53,44.85 44.53,42.23 44.85,41.91 56.04,41.91 56.59,42.47 56.59,44.53 57.24,45.17 U$4.3 58.81,45.17 59.13,44.85 59.13,44.37 61.12,42.39 63.34,42.39 63.74,41.99 v63.74,36.35 | v42.07,15.72 v42.07,40.32